# Altium PCB Q24_Steering_Wheel.PcbDoc
Units mm, origin at the board's own origin, x right, y up, seen from the top; angles counter-clockwise.
Board outline 120 x 70 mm, 2 copper layers (Top Layer, Bottom Layer), stack 1.671 mm thick; 64 components, 39 nets, 229 pads, 63 vias.
Unrouted connection lines stored in the file: 2.
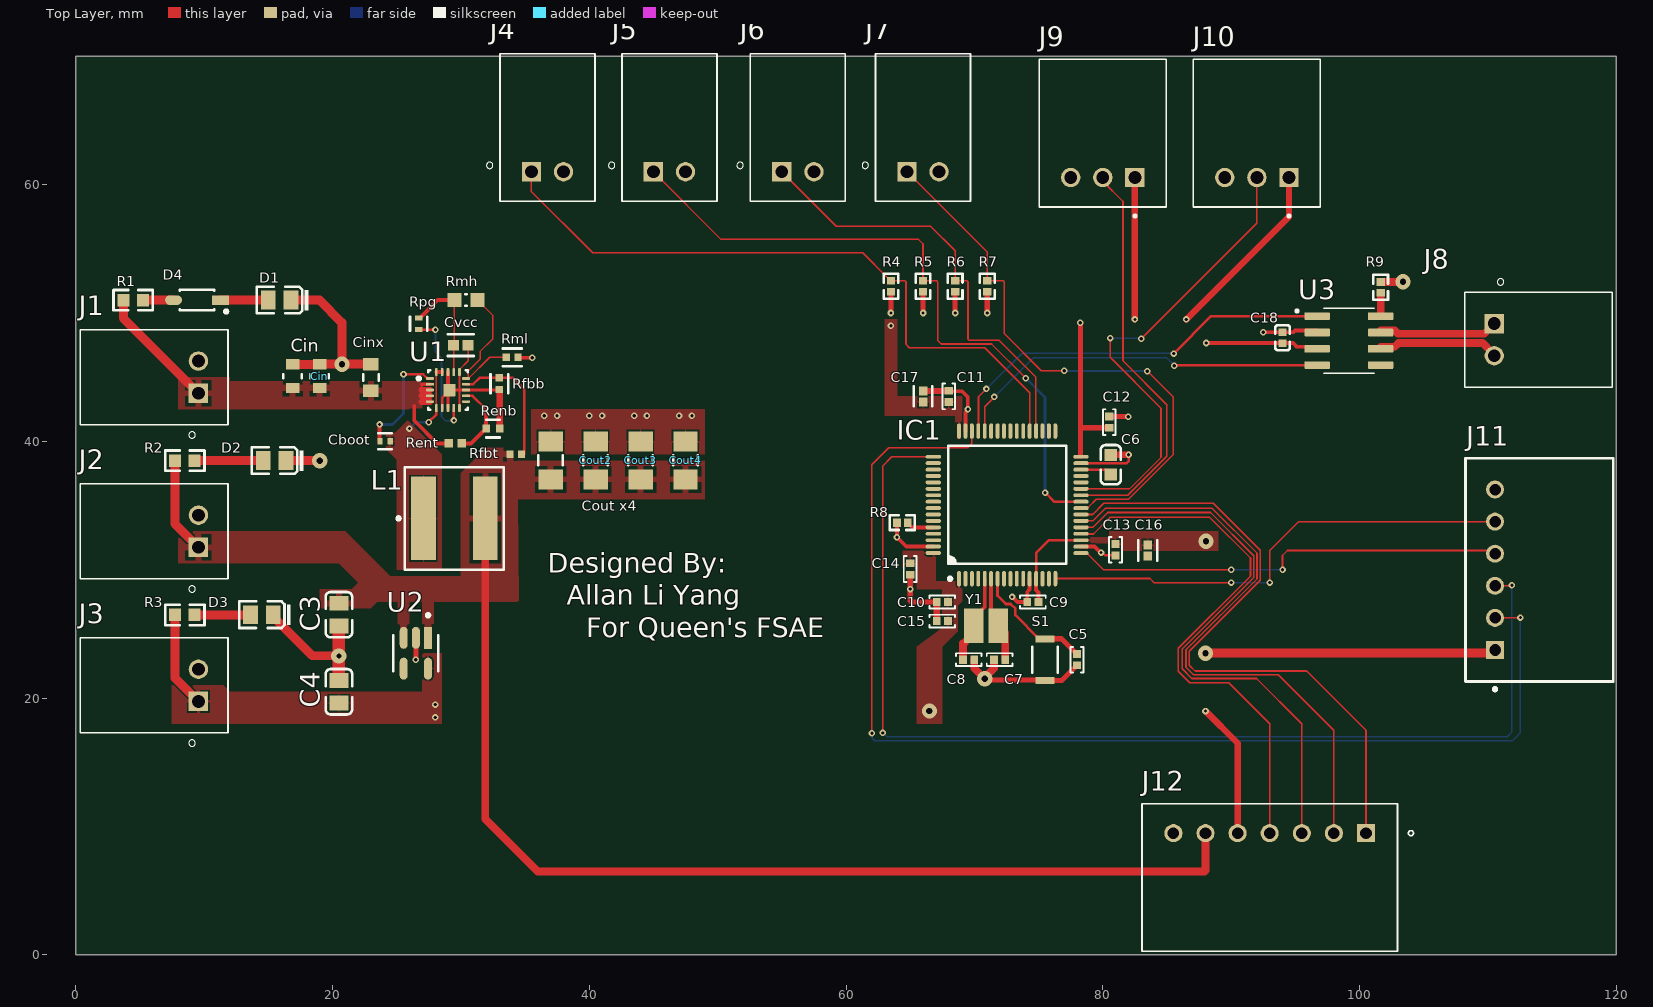
[diagram p0: Top Layer view]
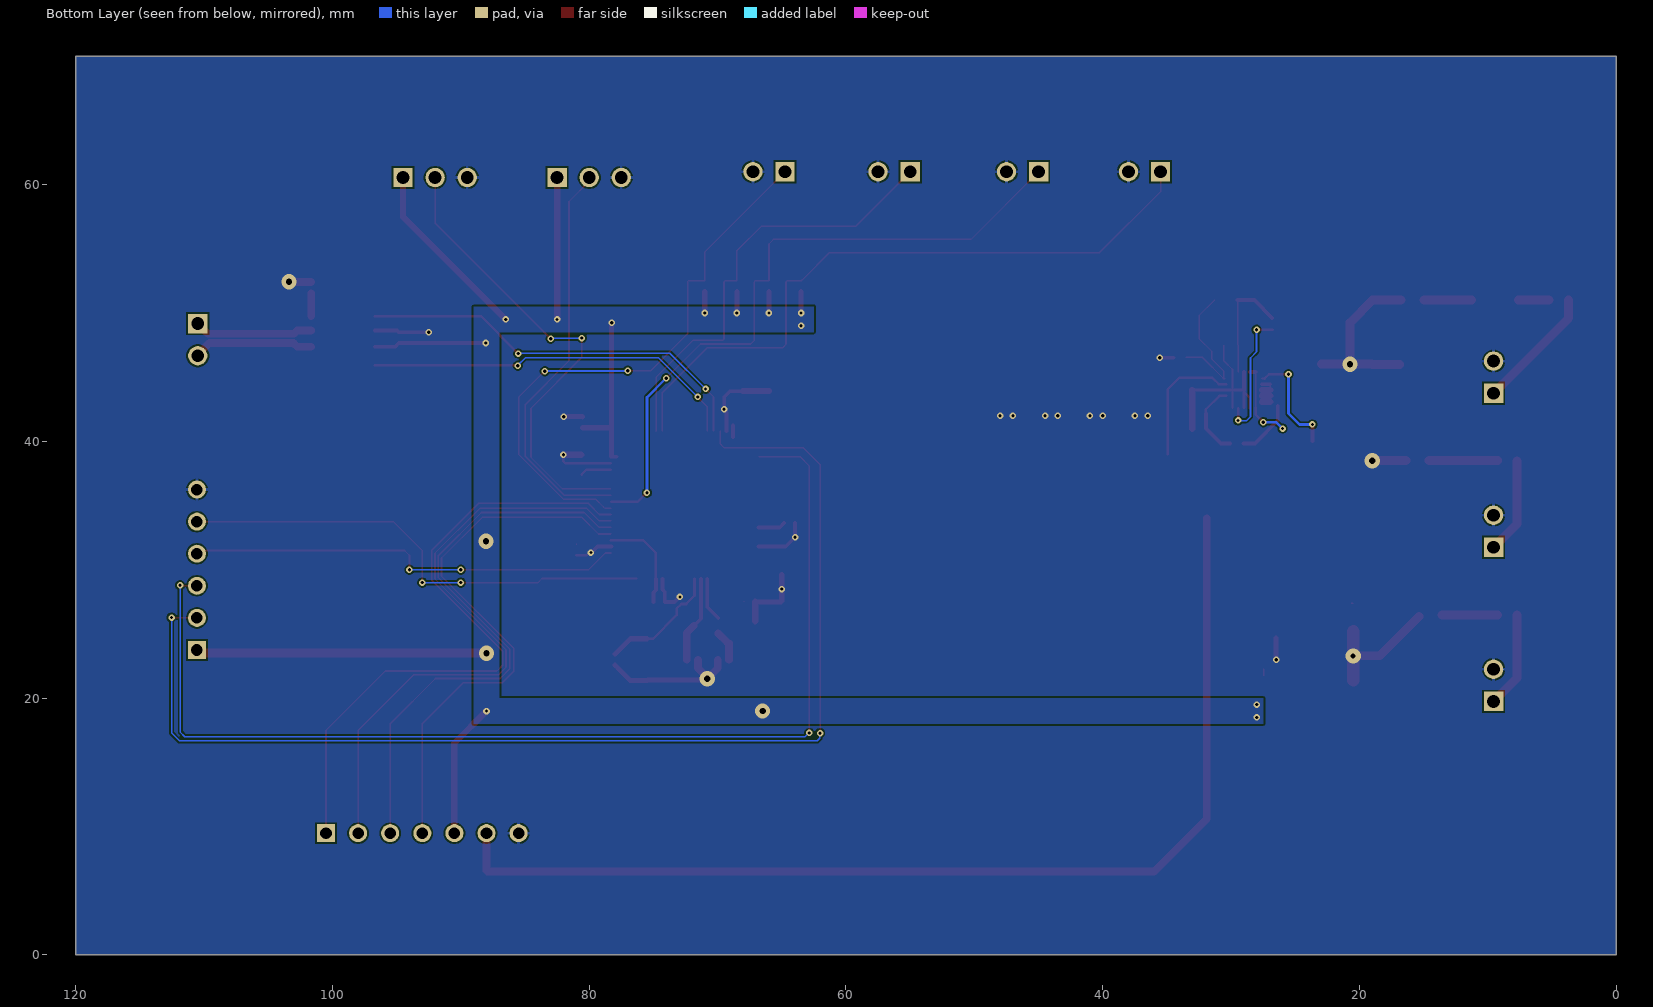
[diagram p1: Bottom Layer view, seen from below]
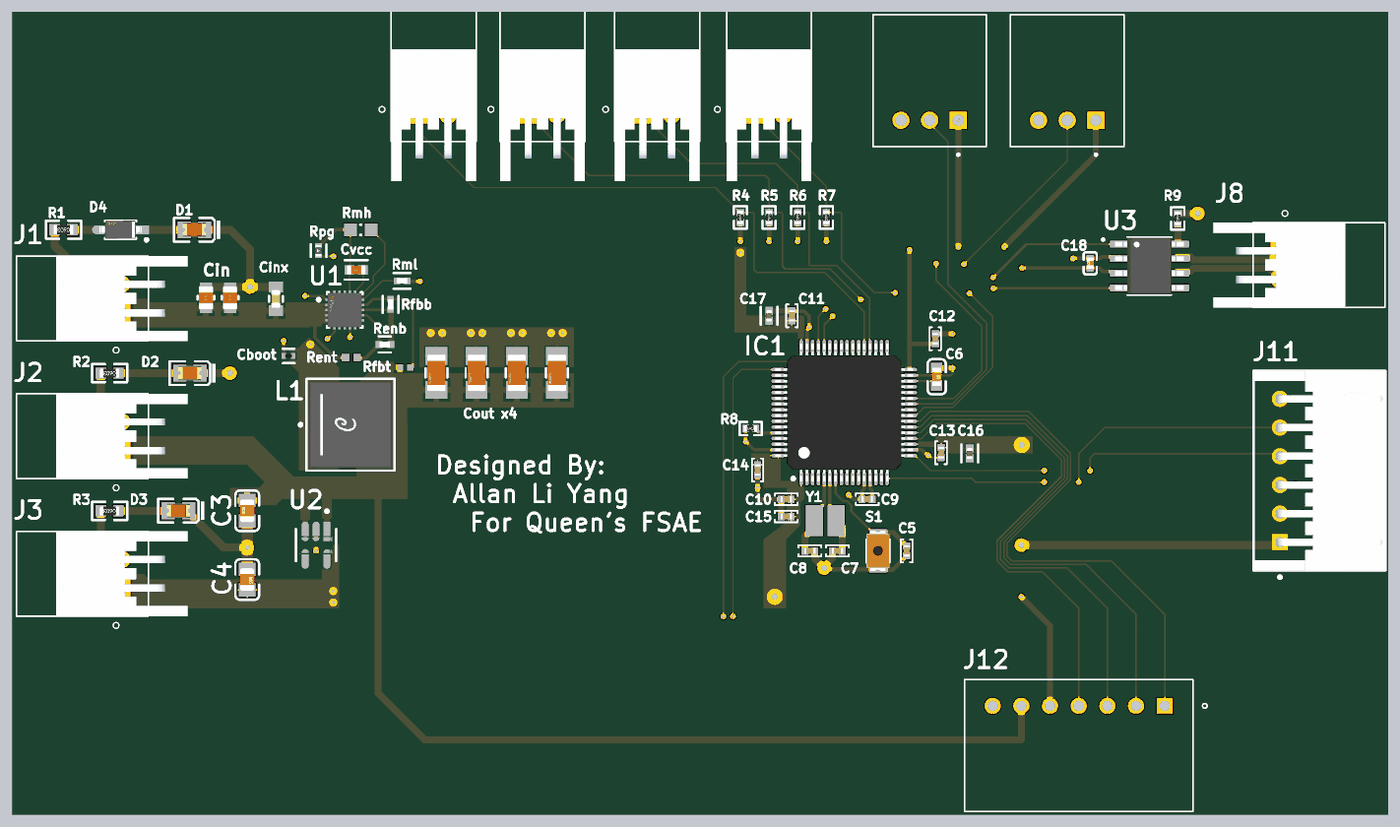
[diagram p2: 3D render of the assembled board from above, using the file's embedded part models]

## Layer stack, top to bottom
Top Solder: solder mask 0.0102, Solder Resist, Dk 3.5
Top Layer: signal copper 0.0356
Dielectric 1: dielectric 1.6, FR-4, Dk 4.8
Bottom Layer: signal copper 0.0356
Bottom Solder: solder mask 0.0102, Solder Resist, Dk 3.5

## Board outline
0,0 0,70 120,70 120,0

## Design rules (kind name [scope] priority, off if disabled: settings)
Clearance [All] p1: gap=0.127 ignorepadtopadclearanceinfootprint=FALSE except(0.25: Arc-Hole Track-Hole SMDPad-Hole THPad-Hole Via-Hole Fill-Hole Poly-Hole Region-Hole Text-Hole; 0.5: THPad-THPad)
DiffPairsRouting [All] p1: maxlimit=0.254 minlimit=0.127 mostfreqgap=0.127 toplayer_minwidth=0.127 toplayer_maxwidth=25.4 toplayer_prefwidth=0.127 bottomlayer_minwidth=0.127 bottomlayer_maxwidth=25.4 bottomlayer_prefwidth=0.127 maxuncoupledlength=12.7
MinimumSolderMaskSliver [All] p1: minsoldermaskwidth=0
PlaneClearance [All] p1: clearance=0.127
PolygonConnect PolygonConnectPowerPad [All vs InNet('VCC12V') or InNet('VCC5V')] p1: thpad.connectstyle=Relief thpad.reliefconductorwidth=0.5 thpad.reliefentries=4 thpad.polygonreliefangle="90 Angle" thpad.airgapwidth=0.254 smdpad.connectstyle=Relief smdpad.reliefconductorwidth=0.5 smdpad.reliefentries=4 smdpad.polygonreliefangle="90 Angle" smdpad.airgapwidth=0.254 via.connectstyle=Direct via.reliefconductorwidth=0.254 via.reliefentries=4 via.polygonreliefangle="90 Angle" via.airgapwidth=0.254
PolygonConnect [All] p2: thpad.connectstyle=Relief thpad.reliefconductorwidth=0.25 thpad.reliefentries=4 thpad.polygonreliefangle="90 Angle" thpad.airgapwidth=0.127 smdpad.connectstyle=Relief smdpad.reliefconductorwidth=0.127 smdpad.reliefentries=4 smdpad.polygonreliefangle="90 Angle" smdpad.airgapwidth=0.127 via.connectstyle=Direct via.reliefconductorwidth=0.127 via.reliefentries=4 via.polygonreliefangle="90 Angle" via.airgapwidth=0.127
RoutingVias [All] p1: holewidth=0.3 width=0.6 viastyle="Through Hole" minholewidth=0.254 minwidth=0.508 maxholewidth=0.6 maxwidth=6.6
SilkToSilkClearance [All] p1: silktosilkclearance=0
SilkToSolderMaskClearance [IsPad] p1: minsilkscreentomaskgap=0.1 clearancetoexposedcopper=TRUE
SolderMaskExpansion [All] p1: expansion=0.102 istentingtop=FALSE
Width [All] p1: maxlimit=25.4 minlimit=0.127 preferedwidth=0.127 minimp=50.000000 maximp=50.000000 favimp=50.000000
25 further rules are at their usual default settings.

## Classes and differential pairs
component class U_Power: C3 C4 Cboot Cin Cinx Cout2 Cout3 Cout4 "Cout x4" Cvcc D1 D2 D3 D4 L1 R1 R2 R3 Renb Rent Rfbb Rfbt Rmh Rml Rpg U2
component class U_MCU: C5 C6 C7 C8 C9 C10 C11 C12 C13 C14 C15 C16 C17 IC1 R8 S1 Y1
component class U_Connectors: J1 J2 J3 J4 J5 J6 J7 J8 J9 J10 J11 J12 R4 R5 R6 R7
component class U_CAN: C18 R9 U3
differential pair CAN1: +CAN1_P -CAN1_N

## Components (designator, comment, footprint, x,y, rotation, side; value= is the part's Value field where it differs from the comment)
C3 "1uF" 0805_C 20.5,26.5 r90 top
C4 "1uF" 0805_C 20.5,20.5 r270 top
C5 "0.1 µF" "CAP 0402_1005" 78,23 r90 top
C6 "2.2uF" 0603_C 80.621,38.181 r270 top
C7 "8 pF" "CAP 0402_1005" 71.964,23 r180 top
C8 "8 pF" "CAP 0402_1005" 69.56,23 r0 top
C9 "0.1 µF" "CAP 0402_1005" 74.56,27.5 r0 top
C10 "0.1 µF" "CAP 0402_1005" 67.5,27.5 r0 top
C11 "0.1 µF" "CAP 0402_1005" 68,43.5 r270 top
C12 "0.1 µF" "CAP 0402_1005" 80.5,41.5 r270 top
C13 "0.1 µF" "CAP 0402_1005" 81,31.56 r90 top
C14 "0.1 µF" "CAP 0402_1005" 65,30.06 r90 top
C15 "0.1 µF" "CAP 0402_1005" 67.5,26 r0 top
C16 "CGB2A1X5R1A105K033BC" FP-CGB2A-IPC_B 83.5,31.5 r270 top
C17 "CGB2A1X5R1A105K033BC" FP-CGB2A-IPC_B 66,43.5 r90 top
C18 "100nF" 0402_C 94,48.075 r90 top
Cboot "GRM155R71C104KA88D" FP-GRM15-MFG 24.1,40 r0 top value=0.10μF
Cin "C2012X5R1V226M125AC" FP-C2012-125-0_2-MFG 19,45.075 r90 top (schematic designator Cin2)
Cin "C2012X5R1V226M125AC" FP-C2012-125-0_2-MFG 16.896,45.075 r90 top (schematic designator Cin1)
Cinx "CGA3E2X7R1H104K080AA" FP-CGA3E-0_3-0_1-IPC_A 23,44.975 r90 top
Cout2 "GRM31CR61A476KE15K" FP-GRM31C-0_2-e0_3_0_8-IPC_A 40.5,38.524 r270 top
Cout3 "GRM31CR61A476KE15K" FP-GRM31C-0_2-e0_3_0_8-IPC_A 44,38.524 r270 top
Cout4 "GRM31CR61A476KE15K" FP-GRM31C-0_2-e0_3_0_8-IPC_A 47.5,38.524 r270 top
"Cout x4" "GRM31CR61A476KE15K" FP-GRM31C-0_2-e0_3_0_8-IPC_A 37,38.524 r270 top (schematic designator Cout1)
Cvcc "EMK107B7105KA-T" FP-0603-L_1_6_0_1-W_0_8_0-IPC_C 30,47.5 r0 top
D1 "0805 Red" 0805_LED_S1 15.89,51 r180 top
D2 "0805 Yellow" 0805_LED_S1 15.5,38.5 r180 top
D3 "0805 Green" 0805_LED_S1 14.5,26.5 r180 top
D4 "1N4148W-TP" FP-SOD-123-IPC_A 9.455,51 r180 top
IC1 "STM32F446RET7" "ST LQFP-64 10X10MM" 72.554,35.054 r90 top
J1 "S2B-XH-A(LF)(SN)" JST_S2B-XH-A(LF)(SN) 9.563,45 r90 top (schematic designator ')
J2 "S2B-XH-A(LF)(SN)" JST_S2B-XH-A(LF)(SN) 9.563,33 r90 top
J3 "S2B-XH-A(LF)(SN)" JST_S2B-XH-A(LF)(SN) 9.563,21 r90 top
J4 "S2B-XH-A(LF)(SN)" JST_S2B-XH-A(LF)(SN) 36.75,61 r0 top
J5 "S2B-XH-A(LF)(SN)" JST_S2B-XH-A(LF)(SN) 46.25,61 r0 top
J6 "S2B-XH-A(LF)(SN)" JST_S2B-XH-A(LF)(SN) 56.25,61 r0 top
J7 "S2B-XH-A(LF)(SN)" JST_S2B-XH-A(LF)(SN) 66,61 r0 top
J8 "S2B-XH-A(LF)(SN)" JST_S2B-XH-A(LF)(SN) 110.488,47.921 r270 top
J9 "S3B-XH-A(LF)(SN)" JST_S3B-XH-A(LF)(SN) 80,64 r0 top
J10 "S3B-XH-A(LF)(SN)" JST_S3B-XH-A(LF)(SN) 92,64 r0 top
J11 "S6B-XH-A (LF)(SN)" FP-S6B-XH-A_LF_SN-MFG 114,30 r270 top
J12 "S7B-XH-A(LF)(SN)" JST_S7B-XH-A(LF)(SN) 93,6.025 r180 top
L1 "XAL7070-182MEC" FP-XAL7070-MFG 29.5,34 r0 top
R1 "1KΩ ±1%" 0603_R 4.487,51 r180 top
R2 "510Ω ±1%" 0603_R 8.5,38.5 r180 top
R3 "220Ω ±1%" 0603_R 8.5,26.486 r180 top
R4 "10KΩ ±1%" 0402_R 63.5,52.075 r270 top
R5 "10KΩ ±1%" 0402_R 66,52.075 r270 top
R6 "10KΩ ±1%" 0402_R 68.5,52.075 r270 top
R7 "10KΩ ±1%" 0402_R 71,52.075 r270 top
R8 "10KΩ ±1%" 0402_R 64.395,33.671 r0 top
R9 "10KΩ ±1%" 0402_R 101.639,51.991 r270 top
Renb "CRCW040251K1FKED" FP-CRCW0402-e3-MFG 32.5,41 r180 top
Rent "CRCW0402221KFKED" RESC1005X40X25ML05T05 29.573,39.85 r180 top
Rfbb "CRCW040215K0FKED" FP-CRCW0402-e3-IPC_B 33,44.5 r90 top
Rfbt "CRCW0402110KFKED" RESC1005X40X25NL05T05 34.268,39 r180 top
Rmh "330K 1% 0603(1608)" RESC0603(1608)_M 30.4,51 r0 top value="330000.00 Ohm"
Rml "CRCW040215K0FKED" FP-CRCW0402-e3-IPC_B 33.997,46.55 r180 top
Rpg "CRCW0402100KFKEDC" FP-CRCW0402-C-e3-MFG 26.719,49.172 r90 top
S1 "KXT341 LHS" "C&K KXT3" 75.5,23 r90 top
U1 "TPS51397ARJER" FP-RJE0020B-MFG 29,44 r0 top
U2 "AP2112K-3.3TRG1" FP-SOT25-IPC_A 26.5,23.5 r270 top
U3 "SN65HVD230DR" SOIC127P599X175-8N 99.169,47.843 r0 top
Y1 "NX3225GD-8MHZ-STD-CRA-3" NDK-NX3225GD-8MHZ-STD-CRA-3_V 70.9,25.639 r0 top

## Footprints (in the part's own frame and the unit in brackets; to place one, negate y for a bottom-side part, rotate by r counter-clockwise, add the part's x,y. Pads: shape width x height; smd on the part's side, far side on the other; paste and mask are expansions set on the pad)
0402_C [mm]
  rect 0.6x0.65 smd mask+0.051: 1(-0.425,0) 2(0.425,0)
  silkscreen extent -0.97,-0.58 0.97,0.58, body extent -0.48,-0.3 0.52,0.3, height 0.2
0402_R [mm]
  rect 0.6x0.65 smd mask+0.051: 1(-0.425,0) 2(0.425,0)
  silkscreen extent -0.97,-0.58 0.97,0.58, body extent -0.57,-0.27 0.58,0.28, height 0.41
0603_C [mm]
  rect 0.93x0.98 smd: 1(-0.77,0) 2(0.77,0)
  silkscreen extent -1.53,-0.79 1.54,0.79, body extent -0.8,-0.4 0.8,0.4, height 0.3
0603_R [mm]
  rect 0.93x0.98 smd: 1(-0.77,0) 2(0.77,0)
  silkscreen extent -1.53,-0.79 1.54,0.79, body extent -0.85,-0.4 0.85,0.4, height 0.56
0805_C [mm]
  rect 1.16x1.47 smd: 1(-0.89,0) 2(0.89,0)
  silkscreen extent -1.77,-1.04 1.77,1.04, body extent -1,-0.62 1,0.63, height 0.77
0805_LED_S1 [mm]
  rect 1.16x1.47 smd: A(0.89,0) K(-0.89,0)
  silkscreen extent -2.24,-1.04 1.77,1.03, body extent -1.01,-0.62 1.01,0.62, height 1.1
"C&K KXT3" [mm]
  rect 0.55x1.5 smd: 1(-1.625,0) 2(1.625,0)
  silkscreen extent -1,-1 1,1, body extent -1.75,-1 1.75,1, height 0.58
"CAP 0402_1005" [mm] "Chip Capacitor, 2-Leads, Body 1.02x0.51mm, IPC Medium Density"
  rect 0.6x0.64 smd: 1(-0.44,0) 2(0.44,0)
  silkscreen extent -1,-0.5 1,0.5, body extent -0.5,-0.26 0.5,0.26, height 0.52
FP-0603-L_1_6_0_1-W_0_8_0-IPC_C [mm]
  rect 0.858x0.812 smd paste+0 mask+0: 1(-0.577,0) 2(0.577,0)
  silkscreen extent -1.01,-0.85 1.01,0.85, body extent -1.11,-0.55 1.11,0.55, height 0.25
FP-C2012-125-0_2-MFG [mm]
  rect 0.8x1.05 smd paste+0 mask+0: 1(-0.925,0) 2(0.925,0)
  silkscreen extent -0.15,-0.72 0.15,0.72, body extent -1.43,-0.82 1.43,0.82, height 0.25
FP-CGA3E-0_3-0_1-IPC_A [mm]
  rect 0.956x1.206 smd paste+0 mask+0: 1(-1.025,0) 2(1.025,0)
  silkscreen extent -0.25,-0.6 0.25,0.6, body extent -2,-1.1 2,1.1, height 0.25
FP-CGB2A-IPC_B [mm]
  rect 0.704x0.658 smd paste+0 mask+0: 1(-0.427,0) 2(0.427,0)
  silkscreen extent -0.78,-0.73 0.78,0.73, body extent -0.93,-0.48 0.93,0.48, height 0.25
FP-CRCW0402-C-e3-MFG [mm]
  rect 0.4x0.6 smd paste+0 mask+0: 1(-0.45,0) 2(0.45,0)
  silkscreen extent -0.55,-0.67 0.55,0.67, body extent -0.75,-0.4 0.75,0.4, height 0.25
FP-CRCW0402-e3-IPC_B [mm]
  rect 0.568x0.572 smd paste+0 mask+0: 1(-0.452,0) 2(0.452,0)
  silkscreen extent -0.74,-0.69 0.74,0.69, body extent -0.89,-0.44 0.89,0.44, height 0.25
FP-CRCW0402-e3-MFG [mm]
  rect 0.6x0.6 smd paste+0 mask+0: 1(-0.525,0) 2(0.525,0)
  silkscreen extent -0.53,-0.7 0.53,0.7, body extent -0.92,-0.4 0.92,0.4, height 0.25
FP-GRM15-MFG [mm]
  rect 0.4x0.5 smd paste+0 mask+0: 1(-0.4,0) 2(0.4,0)
  silkscreen extent -0.53,-0.63 0.53,0.63, body extent -0.7,-0.38 0.7,0.38, height 0.25
FP-GRM31C-0_2-e0_3_0_8-IPC_A [mm]
  rect 1.555x1.906 smd paste+0 mask+0: 1(-1.476,0) 2(1.476,0)
  silkscreen extent -0.4,-0.95 0.4,0.95, body extent -2.75,-1.45 2.75,1.45, height 0.25
FP-RJE0020B-MFG [mm]
  rrect50% 0.6x0.2 smd paste+0 mask+0: 1(-1.4,0.9) 2(-1.4,0.45) 3(-1.4,0) 4(-1.4,-0.45) 5(-1.4,-0.9) 11(1.4,-0.9) 12(1.4,-0.45) 13(1.4,0) 14(1.4,0.45) 15(1.4,0.9)
  rrect50% 0.2x0.6 smd paste+0 mask+0: 6(-0.9,-1.4) 7(-0.45,-1.4) 8(0,-1.4) 9(0.45,-1.4) 10(0.9,-1.4) 16(0.9,1.4) 17(0.45,1.4) 18(0,1.4) 19(-0.45,1.4) 20(-0.9,1.4)
  rrect11% 0.926x0.975 smd paste+0 mask+0: 21(0.123,-0.007)
  silkscreen extent -2.4,-1.55 1.55,1.55, body extent -1.8,-1.8 1.8,1.8, height 0.25
FP-S6B-XH-A_LF_SN-MFG [mm]
  rect 1.4x1.4 hole 0.9 paste-1000 mask+0: 1(6.25,-3.45)
  round 1.4 hole 0.9 paste-1000 mask+0: 2(3.75,-3.45) 3(1.25,-3.45) 4(-1.25,-3.45) 5(-3.75,-3.45) 6(-6.25,-3.45)
  silkscreen extent -8.7,-5.75 9.42,5.75, body extent -8.8,-5.85 8.8,5.85, height 0.25
FP-SOD-123-IPC_A [mm]
  rect 1.308x0.762 smd paste+0 mask+0: 1(-1.825,0)
  rrect100% 1.308x0.762 smd paste+0 mask+0: 2(1.825,0)
  silkscreen extent -2.39,-0.8 1.35,1.01, body extent -2.98,-1.3 2.98,1.3, height 0.25
FP-SOT25-IPC_A [mm]
  rect 1.707x0.616 smd paste+0 mask+0: 1(-1.201,0.95)
  rrect100% 1.707x0.616 smd paste+0 mask+0: 2(-1.201,0) 3(-1.201,-0.95) 4(1.201,-0.95) 5(1.201,0.95)
  silkscreen extent -3.08,-1.75 1.4,1.75, body extent -2.55,-2 2.55,2, height 0.25
FP-XAL7070-MFG [mm]
  rect 1.92x6.5 smd paste+0 mask+0: 1(-2.41,0) 2(2.41,0)
  silkscreen extent -4.47,-4 3.85,4, body extent -3.95,-4.1 3.95,4.1, height 0.25
JST_S2B-XH-A(LF)(SN) [mm]
  rect 1.508x1.508 / inner round 1.508 / far side rect 1.508x1.508 hole 1: 1(-1.25,0)
  round 1.508 hole 1: 2(1.25,0)
  silkscreen extent -4.75,-2.3 3.7,9.2, body extent -3.7,-5.75 3.7,5.75, height 6.1
JST_S3B-XH-A(LF)(SN) [mm]
  rect 1.508x1.508 / inner round 1.508 / far side rect 1.508x1.508 hole 1: 1(2.5,-3.45)
  round 1.508 hole 1: 2(0,-3.45) 3(-2.5,-3.45)
  silkscreen extent -4.95,-6.55 4.95,5.75
JST_S7B-XH-A(LF)(SN) [mm]
  rect 1.408x1.408 hole 0.9: 1(-7.5,-3.46)
  round 1.408 hole 0.9: 2(-5,-3.46) 3(-2.5,-3.46) 4(0,-3.46) 5(2.5,-3.46) 6(5,-3.46) 7(7.5,-3.46)
  silkscreen extent -11.2,-5.75 9.95,5.75
NDK-NX3225GD-8MHZ-STD-CRA-3_V [mm] "SMD, 2-Leads, Body 3.2x2.5mm"
  rect 1.5x2.7 smd: 1(-0.95,0) 2(0.95,0)
  body extent -1.6,-1.25 1.6,1.25, height 1
RESC0603(1608)_M [mm] "Chip Resistor, Body 1.6x0.8mm, IPC Low Density"
  rect 1.1x1.1 smd: 1(-0.9,0) 2(0.9,0)
  silkscreen extent -0.05,-0.45 0.05,0.45, body extent -0.85,-0.47 0.85,0.47, height 0.6
RESC1005X40X25ML05T05 [mm] "Chip Resistor, 2-Leads, Body 1.00x0.50mm, IPC Low Density"
  rect 0.65x0.65 smd: 1(-0.5,0) 2(0.5,0)
  body extent -0.53,-0.27 0.53,0.28, height 0.4
RESC1005X40X25NL05T05 [mm] "Chip Resistor, 2-Leads, Body 1.00x0.50mm, IPC Medium Density"
  rect 0.55x0.55 smd: 1(-0.45,0) 2(0.45,0)
  body extent -0.53,-0.27 0.53,0.28, height 0.4
SOIC127P599X175-8N [mm]
  rrect25% 1.97x0.6 smd: 1(-2.47,1.905) 2(-2.47,0.635) 3(-2.47,-0.635) 4(-2.47,-1.905) 5(2.47,-1.905) 6(2.47,-0.635) 7(2.47,0.635) 8(2.47,1.905)
  silkscreen extent -4.14,-2.52 1.95,2.52, body extent -3,-2.45 3,2.45, height 1.75
"ST LQFP-64 10X10MM" [mm] "LQFP, 64-Leads, Body 10.00x10.00mm, Pitch 0.50mm, IPC Medium Density"
  oval 1.2x0.3 smd: 1(-5.75,3.75) 2(-5.75,3.25) 3(-5.75,2.75) 4(-5.75,2.25) 5(-5.75,1.75) 6(-5.75,1.25) 7(-5.75,0.75) 8(-5.75,0.25) 9(-5.75,-0.25) 10(-5.75,-0.75) 11(-5.75,-1.25) 12(-5.75,-1.75) 13(-5.75,-2.25) 14(-5.75,-2.75) 15(-5.75,-3.25) 16(-5.75,-3.75) 33(5.75,-3.75) 34(5.75,-3.25) 35(5.75,-2.75) 36(5.75,-2.25) 37(5.75,-1.75) 38(5.75,-1.25) 39(5.75,-0.75) 40(5.75,-0.25) 41(5.75,0.25) 42(5.75,0.75) 43(5.75,1.25) 44(5.75,1.75) 45(5.75,2.25) 46(5.75,2.75) 47(5.75,3.25) 48(5.75,3.75)
  oval 0.3x1.2 smd: 17(-3.75,-5.75) 18(-3.25,-5.75) 19(-2.75,-5.75) 20(-2.25,-5.75) 21(-1.75,-5.75) 22(-1.25,-5.75) 23(-0.75,-5.75) 24(-0.25,-5.75) 25(0.25,-5.75) 26(0.75,-5.75) 27(1.25,-5.75) 28(1.75,-5.75) 29(2.25,-5.75) 30(2.75,-5.75) 31(3.25,-5.75) 32(3.75,-5.75) 49(3.75,5.75) 50(3.25,5.75) 51(2.75,5.75) 52(2.25,5.75) 53(1.75,5.75) 54(1.25,5.75) 55(0.75,5.75) 56(0.25,5.75) 57(-0.25,5.75) 58(-0.75,5.75) 59(-1.25,5.75) 60(-1.75,5.75) 61(-2.25,5.75) 62(-2.75,5.75) 63(-3.25,5.75) 64(-3.75,5.75)
  silkscreen extent -5.87,-4.6 4.6,4.6, body extent -6.01,-6.01 6.01,6.01, height 1.6

## Part data
C3 C4: library part "0805 1uF (105) 10% 50V", "Chip capacitors", Manufacturer="Samsung Electro-Mechanics", Package=0805, PartNumber=CL21B105KBFNNNE, SuppliersPartNumber=C28323, Tolerance=10%, Voltage=50V, Capacitance=1uF, ComponentLink1Description="Supplier link", ComponentLink1URL=http://www.szlcsc.com/product/details_29074.html, Supplier=LC
C5 C9 C10 C11 C12 C13 C14 C15: library part C0402C104K4RECAUTO, "CAP CER 0402 0.1UF 16V X7R 10%", Device Package="0402 (1005 Metric)", Manufacturer=KEMET, Operating Temperature="-55°C ~ 125°C", Ratings=AEC-Q200, Supplier Part Number 1=399-17167-1-ND, Temperature Coefficient=X7R, Tolerance=±10%, Voltage - Rated=16V, Applications="Automotive, ESD Protection", Capacitance="0.1 µF", ComponentLink1Description=Datasheet, ComponentLink1URL=https://api.kemet.com/component-edge/download/datasheet/C0402C104K4RECAUTO.pdf, componentlink2description="DigiKey Link", componentlink2url=https://www.digikey.com/en/products/detail/kemet/C0402C104K4RECAUTO/8563695, lastupdated="2023-09-26 7:04:17 PM", Lifecycle Status=Active, Minimum Order=1, Mounting Type="Surface Mount, MLCC", Package / Case="0402 (1005 Metric)", packaging=TapeAndReel, Part Number=C0402C104K4RECAUTO, Part Status=Active, partid=1731, price=0.01, series="ESD SMD Auto X7R", Size / Dimension="0.039\" L x 0.020\" W (1.00mm x 0.50mm)", Supplier 1=DigiKey, Thickness (Max)="0.022\" (0.55mm)"
C6: library part "0603 2.2uF (225) 10% 16V", "Chip capacitors", Manufacturer="Samsung Electro-Mechanics", Package=0603, PartNumber=CL10A225KO8NNNC, SuppliersPartNumber=C23630, Tolerance=10%, Voltage=16V, Capacitance=2.2uF, ComponentLink1Description="Supplier link", ComponentLink1URL=http://www.szlcsc.com/product/details_24366.html, Supplier=LC
C7 C8: library part C1005NP01H080D050BA, "CAP CER 8PF 50V NP0 0402", Device Package="0402 (1005 Metric)", Manufacturer="TDK Corporation", Operating Temperature="-55°C ~ 150°C", Supplier Part Number 1=445-13781-1-ND, Temperature Coefficient="C0G, NP0", Tolerance=±0.5pF, Voltage - Rated=50V, Applications="General Purpose", Capacitance="8 pF", ComponentLink1Description=Datasheet, ComponentLink1URL=https://product.tdk.com/info/en/catalog/datasheets/mlcc_commercial_hightemp_en.pdf?ref_disty=digikey, componentlink2description="DigiKey Link", componentlink2url=https://www.digikey.com/en/products/detail/tdk-corporation/C1005NP01H080D050BA/3951017, Features="High Temperature", lastupdated="2023-09-26 7:04:16 PM", Lifecycle Status=Active, Minimum Order=1, Mounting Type="Surface Mount, MLCC", Package / Case="0402 (1005 Metric)", packaging=TapeAndReel, Part Number=C1005NP01H080D050BA, Part Status=Active, partid=2033, price=0.01, series=C, Size / Dimension="0.039\" L x 0.020\" W (1.00mm x 0.50mm)", Supplier 1=DigiKey, Thickness (Max)="0.022\" (0.55mm)"
C16 C17: library part CMP-08246-005807-1, "Multilayer Ceramic Capacitors 1uF ±10% 10V X5R SMD 0402", Capacitance=1uF, Case Code (Imperial)=0402, Case Code (Metric)=1005, Max Operating Temperature=85°C, Min Operating Temperature=-55°C, Package Quantity=10000, Tolerance=10%, Voltage Rating=10V, Case/Package=0402, Lead Free="Lead Free", Length=0.039inch, Mount="Surface Mount", packaging="Tape and Reel", RoHS Compliant=Yes, series=CGB, Thickness=0.013inch, Width=0.02inch
C18: library part "0402 100nF (104) 10% 16V", "Chip capacitors", Manufacturer="Samsung Electro-Mechanics", Package=0402, PartNumber=CL05B104KO5NNNC, SuppliersPartNumber=C1525, Tolerance=10%, Voltage=16V, Capacitance=100nF, ComponentLink1Description="Supplier link", ComponentLink1URL=http://www.szlcsc.com/product/details_1877.html, Supplier=LC
Cboot: library part CMP-2100-03641-2, "CAP CER 0.1UF 16V X7R 0402", Capacitance=0.10μF, Manufacturer=Murata, Package=GRM15, Temperature="-55°C to +125°C", Temperature Characteristic=X7R, Temperature Range High=+125°C, Temperature Range Low=-55°C, Tolerance=10%, Voltage Rating=16Vdc, Category=Cap, componentlink2description=Datasheet, componentlink2url=https://search.murata.co.jp/Ceramy/image/img/A01X/G101/ENG/GRM155R71H471KA01-01A.pdf, Device Class L1="Passive Components", Device Class L2=Capacitors, Device Class L3="Ceramic Capacitors", Digikey Description="CAP CER 0.1UF 16V X7R 0402", Height=0.55mm, Ipc Land Pattern Name=CAPC10050X219, Lead Free=yes, Manufacturer Part Number=GRM155R71C104KA88D, Material=Ceramic, Mouser Description="0402 0.1 uF 16V ±10 % Tolerance X7R SMT Multilayer Ceramic Capacitor", Octopart=https://octopart.com/grm155r71c104ka88d-murata-196880, RoHS=TRUE, Standoff Height=0mm
Cin Cin: library part CMP-2000-06038-3, "Multilayer Ceramic Capacitors 22μF ±20% 35V X5R SMD 0805", Capacitance=22uF, Case Code (Imperial)=0805, Case Code (Metric)=2012, Dielectric=X5R, Dielectric Material=Ceramic, Max Operating Temperature=85°C, Min Operating Temperature=-55°C, Package Quantity=2000, Tolerance=20%, Voltage Rating=35V, Case/Package=0805, Height=1.25mm, Lead Free="Lead Free", Length=0.079inch, Mount="Surface Mount", packaging="Tape and Reel", REACH SVHC="No SVHC", RoHS Compliant=Yes, series=C, Termination=SMD/SMT, Thickness=0.057inch, Voltage Rating (DC)=35V, Weight=0.000194oz, Width=0.049inch
Cinx: library part CMP-2000-07546-2, "Cap Ceramic 100nF 50V X7R 10% Pad SMD 0603 +125°C Automotive T/R", Capacitance=100nF, Case Code (Imperial)=0603, Case Code (Metric)=1608, Dielectric=X7R, Max Operating Temperature=125°C, Min Operating Temperature=-55°C, Package Quantity=1, Ratings=AEC-Q200, Tolerance=10%, Voltage=50V, Case/Package=0603, Composition=Ceramic, Depth=0.8mm, Height=0.8mm, Lead Free="Lead Free", Length=1.6mm, Mount="Surface Mount", packaging="Tape and Reel", Radiation Hardening=No, REACH SVHC="No SVHC", Termination=SMD/SMT, Thickness=0.035inch, Voltage Rating=50V, Voltage Rating (DC)=50V, Weight=7.1E-05oz, Width=0.8mm
Cout2 Cout3 Cout4 "Cout x4": library part CMP-06035-007919-1, "Chip Multilayer Ceramic Capacitors for General Purpose, 1206, 47uF, X5R, 15%, 10%, 10V", Capacitance=47uF, Case Code (Imperial)=1206, Case Code (Metric)=3216, Dielectric=X5R, Max Operating Temperature=85°C, Min Operating Temperature=-55°C, Package Quantity=6000, Resistor Type=Ceramic, Tolerance=10%, Voltage Rating=10V, Case/Package=1206, Depth=1.6mm, Height=1.6mm, Length=3.2mm, Mount="Surface Mount", packaging="Tape and Reel", Termination=SMD/SMT, Thickness=0.071inch, Voltage Rating (DC)=10V, Weight=0.001411oz, Width=0.063inch
Cvcc: library part CMP-14477-000018-3, "None", Capacitance=1uF, Case Code (Imperial)=0603, Case Code (Metric)=1608, Dielectric=X7R, Max Operating Temperature=125°C, Min Operating Temperature=-55°C, Package Quantity=1, Resistor Type=Ceramic, Tolerance=10%, Voltage Rating=16V, Case/Package=0603, Construction=Flat, Contact Plating=Nickel, Depth=0.8mm, Halogen Free="Halogen Free", Height=0.8mm, Lead Free="Lead Free", Length=1.6mm, Mount="Surface Mount", Number of Pins=2, packaging="Tape and Reel", Radiation Hardening=No, REACH SVHC="No SVHC", RoHS Compliant=Yes, series=M, Termination=SMD/SMT, Thickness=0.035inch, Voltage Rating (DC)=16V, Width=0.031inch
D1: library part "0805 LED Red", "LED", Color=Red, Manufacturer="Foshan NationStar Optoelectronics", Package=0805, PartNumber=FC-2012HRK-620D, SuppliersPartNumber=C84256, ComponentLink1Description=供应商链接, ComponentLink1URL=http://www.szlcsc.com/product/details_2668.html, Supplier=LC
D2: library part "0805 LED Yellow", "LED", Color=Yellow, Package=0805, PartNumber=17-21SUYC/TR8, SuppliersPartNumber=C2296, ComponentLink1Description=供应商链接, ComponentLink1URL=http://www.szlcsc.com/product/details_2669.html, Supplier=LC
D3: library part "0805 LED Green", "LED", Color=Green, Package=0805, SuppliersPartNumber=C2297, ComponentLink1Description=供应商链接, ComponentLink1URL=http://www.szlcsc.com/product/details_2670.html, Supplier=LC
D4: library part CMP-2000-04993-2, "DIODE GEN PURP 100V 150MA SOD123", Average Rectified Current=150mA, Capacitance=4pF, Forward Voltage=1V, Max Forward Surge Current (Ifsm)=1A, Max Operating Temperature=150°C, Max Repetitive Reverse Voltage (Vrrm)=100V, Max Reverse Leakage Current=5uA, Max Surge Current=2A, Min Operating Temperature=-65°C, Package Quantity=3000, Power Dissipation=400mW, Current Rating=150mA, Element Configuration=Single, Forward Current=150mA, Height=1.2mm, Lead Free="Lead Free", Length=2.85mm, Max Reverse Voltage (DC)=100V, Mount="Surface Mount", Number of Pins=2, Output Current=150mA, packaging="Tape and Reel", Peak Non-Repetitive Surge Current=2A, Polarity=Standard, Radiation Hardening=No, Recovery Time=4ns, Reverse Recovery Time=4ns, Voltage Rating (DC)=100V, Width=1.8mm
IC1: "IC MCU 32BIT 512KB FLASH 64LQFP", Manufacturer=STMicroelectronics, Operating Temperature="-40°C ~ 105°C (TA)", Supplier Device Package="64-LQFP (10x10)", Supplier Part Number 1=497-16775-ND, Voltage - Supply (Vcc/Vdd)="1.7V ~ 3.6V", ComponentLink1Description=Datasheet, ComponentLink1URL=https://www.st.com/content/ccc/resource/technical/document/datasheet/65/cb/75/50/53/d6/48/24/DM00141306.pdf/files/DM00141306.pdf/jcr:content/translations/en.DM00141306.pdf, componentlink2description="DigiKey Link", componentlink2url=https://www.digikey.com/en/products/detail/stmicroelectronics/STM32F446RET7/6207480, Connectivity="CANbus, EBI/EMI, I²C, IrDA, LINbus, SAI, SD, SPDIF-Rx, SPI, UART/USART, USB, USB OTG", Core Processor="ARM® Cortex®-M4", Core Size="32-Bit Single-Core", Data Converters="A/D 16x12b; D/A 2x12b", lastupdated="2023-07-12 8:21:53 PM", Lifecycle Status=Active, Minimum Order=1, Mounting Type="Surface Mount", Number of I/O=50, Oscillator Type=Internal, packaging=Tray, Part Number=STM32F446RET7, Part Status=Active, partid=220, Peripherals="Brown-out Detect/Reset, DMA, I²S, LVD, POR, PWM, WDT", price=7.43, Program Memory Size="512KB (512K x 8)", Program Memory Type=FLASH, RAM Size="128K x 8", series=STM32F4, Speed=180MHz, Supplier 1=DigiKey
J1 J2 J3 J4 J5 J6 J7 J8: "Connector Header Through Hole, Right Angle 2 position 0.098 (2.50mm)", Package=None, Check_prices=https://www.snapeda.com/parts/S2B-XH-A(LF)(SN)/JST+Sales+America+Inc./view-part/?ref=eda, Digi-Key_Part_Number=455-2257-ND, MF="JST Sales", MP=S2B-XH-A(LF)(SN), Purchase-URL=https://pricing.snapeda.com/search/part/S2B-XH-A(LF)(SN)/?ref=eda, SnapEDA_Link=https://www.snapeda.com/parts/S2B-XH-A(LF)(SN)/JST+Sales+America+Inc./view-part/?ref=snap
J9 J10: "CONN, R/A HEADER, 3POS, 1ROW, 2.5MM; Connector Systems:Wire-to-Board; Pitch Spacing:2.5mm; No. of Rows:1Rows; No. of Contacts:3Contacts; Contact Termination Type:Through Hole Right Angle; Product Range:XH Series RoHS Compliant: Yes", Package=None, Availability="In Stock", Check_prices=https://www.snapeda.com/parts/S3B-XH-A%20(LF)(SN)/JST/view-part/?ref=eda, MF=JST, MP="S3B-XH-A (LF)(SN)", price=None, Purchase-URL="https://pricing.snapeda.com/search/part/S3B-XH-A (LF)(SN)/?ref=eda", SnapEDA_Link=https://www.snapeda.com/parts/S3B-XH-A%20(LF)(SN)/JST/view-part/?ref=snap
J11: library part CMP-17439-000165-2, "CONN HEADER R/A 6POS 2.5MM", Color=Natural, Contact Resistance=20mR, Current Rating=3A, Flammability Rating="UL94 V-0", Housing Color=White, Insulation Resistance=1GR, Max Operating Temperature=85°C, Max Voltage Rating (AC)=250V, Min Operating Temperature=-25°C, Package Quantity=500, Connector Type=Header, Contact Finish - Mating=TIN, Contact material=Brass, Contact Plating=Tin, Contact Shape=Square, Contact Type="Male Pin", Depth=11.5mm, Fastening Type=Detent, Gender=Male, Housing Material=Polyamide, Insulation Color=Natural, Insulation Material=Nylon, Lead Free="Lead Free", Lead Pitch=2.5mm, Length=17.4mm, Max Current Rating=3A, Mount="Through Hole", Number of Contacts=6, Number of Positions=6, Number of Rows=1, Orientation="Right Angle", packaging=Bulk, Pitch=2.5mm, REACH SVHC="No SVHC", series=XH, Termination=Solder, Voltage Rating=250V, Voltage Rating (AC)=250V, Wire/Cable Gauge=22AWG
J12: "Connector Header Through Hole, Right Angle 7 position 0.098 _2.50mm_", Package=None, Availability=Unavailable, MF="JST Sales", MP=S7B-XH-A_LF__SN_, price=None, SnapEDA_Link=https://www.snapeda.com/parts/S7B-XH-A%28LF%29%28SN%29/JST%20Sales%20America%20Inc./view-part/2768211/?ref=snap
L1: library part CMP-11268-000116-1, "Surface Mount Power Inductor, 1.8 H, 21 A, 25 A, Shielded, 4460 ohm", Case/Package=SMD/SMT, DC Resistance (DCR)=4.46mR, Inductance=1.8uH, Inductance Tolerance=20%, Max DC Current=21A, Max Operating Temperature=125°C, Min Operating Temperature=-40°C, Package Quantity=150, Saturation Current=25A, Self Resonant Frequency=43MHz, Test Frequency=100kHz, Core Material=Composite, Height=7mm, Lead Free="Contains Lead", Length=8mm, Mount="Surface Mount", packaging="Tape and Reel", REACH SVHC="No SVHC", RMS Current (Irms)=21A, RoHS Compliant=Yes, series=XAL7070, Shielding=Shielded, Termination=SMD/SMT, Tolerance=20%, Width=7.7mm
R1: library part "0603 1K (1001) 1%", "Chip resistor", Manufacturer="Uniroyal Elec", Package=0603, PartNumber=0603WAF1001T5E, Power=1/10W, Resistance=1KΩ, SuppliersPartNumber=C21190, Tolerance=1%, ComponentLink1Description="Supplier link", ComponentLink1URL=http://www.szlcsc.com/product/details_21904.html, Supplier=LC
R2: library part "0603 510R (5100) 1%", "Chip resistor", Manufacturer="Uniroyal Elec", Package=0603, PartNumber=0603WAF5100T5E, Power=1/10W, Resistance=510Ω, SuppliersPartNumber=C23193, Tolerance=1%, ComponentLink1Description="Supplier link", ComponentLink1URL=http://www.szlcsc.com/product/details_23920.html, Supplier=LC
R3: library part "0603 220R (2200) 1%", "Chip resistor", Manufacturer="Uniroyal Elec", Package=0603, PartNumber=0603WAF2200T5E, Power=1/10W, Resistance=220Ω, SuppliersPartNumber=C22962, Tolerance=1%, ComponentLink1Description="Supplier link", ComponentLink1URL=http://www.szlcsc.com/product/details_23689.html, Supplier=LC
R4 R5 R6 R7 R8 R9: library part "0402 10K (1002) 1%", "Chip resistor", Manufacturer="Uniroyal Elec", Package=0402, PartNumber=0402WGF1002TCE, Power=1/16W, Resistance=10KΩ, SuppliersPartNumber=C25744, Tolerance=1%, ComponentLink1Description="Supplier link", ComponentLink1URL=http://www.szlcsc.com/product/details_26487.html, Supplier=LC
Renb: library part CMP-2002-00080-2, "RES Thick Film, 51.1kΩ, 1%, 0.063W, 100ppm/°C, 0402", Case Code (Imperial)=0402, Case Code (Metric)=1005, Max Operating Temperature=155°C, Max Power Dissipation=63mW, Min Operating Temperature=-55°C, Package Quantity=10, Resistance=51.1kR, Temperature Coefficient=100ppm/°C, Tolerance=1%, Voltage Rating=50V, Case/Package=0402, Composition="Thick Film", Contact Plating=Tin, Depth=0.5mm, Features="Automotive AEC-Q200", Height=0.35mm, Lead Free="Lead Free", Length=1mm, Military Standard=Not, Mount="Surface Mount", Number of Pins=2, Number of Terminations=2, packaging="Tape and Reel", Power Rating=63mW, Radiation Hardening=No, Termination=SMD/SMT, Voltage Rating (DC)=50V, Weight=2.3E-05oz, Width=0.5mm
Rent: library part CMP-2002-08374-1, Manufacturer="Vishay Dale", Part Number=CRCW0402221KFKED
Rfbb Rml: library part CMP-2002-08219-2, "RES Thick Film, 15kΩ, 1%, 0.063W, 100ppm/°C, 0402", Case Code (Imperial)=0402, Case Code (Metric)=1005, Max Operating Temperature=155°C, Max Power Dissipation=63mW, Min Operating Temperature=-55°C, Package Quantity=10, Resistance=15kR, Temperature Coefficient=100ppm/°C, Tolerance=1%, Voltage Rating=50V, Case/Package=0402, Composition="Thick Film", Contact Plating=Tin, Depth=0.5mm, Features="Automotive AEC-Q200", Height=0.35mm, Lead Free="Lead Free", Length=1mm, Military Standard=Not, Mount="Surface Mount", Number of Terminations=2, packaging="Tape and Reel", Power Rating=63mW, Radiation Hardening=No, Termination=SMD/SMT, Voltage Rating (DC)=50V, Weight=2.3E-05oz, Width=0.02inch, Working Voltage=50V
Rfbt: library part CMP-2002-08148-1, Manufacturer="Vishay Dale", Part Number=CRCW0402110KFKED
Rmh: library part CMP-1012-00793-1, "330K 0.1W 1% 0603 (1608 Metric)  SMD", Case-EIA=0603, Case-Metric=1608, Power="0.1 W", Tolerance="1 %", Technology=SMT
Rpg: library part CMP-02407-010951-1, "RES 100K OHM 1% 1/16W 0402", Case/Package=SMD/SMT, Max Operating Temperature=155°C, Min Operating Temperature=-55°C, Power Rating=62.5mW, Resistance=100kR, Resistor Type="Thick Film", Temperature Coefficient=100ppm/°C, Tolerance=1%, Contact Plating=Tin, Lead Free="Lead Free", Length=1mm, Mount="Surface Mount", RoHS Compliant=Yes, Termination=Wraparound
S1: "SWITCH TACTILE SPST-NO 0.02A 15V", Contact Rating @ Voltage="0.02A @ 15VDC", Manufacturer=C&K, Operating Force=330gf, Operating Temperature="-40°C ~ 85°C", Supplier Part Number 1=CKN10781CT-ND, Actuator Height off PCB, Vertical=0.60mm, Actuator Orientation="Top Actuated", Actuator Type=Standard, Circuit=SPST-NO, ComponentLink1Description=Datasheet, ComponentLink1URL=https://dznh3ojzb2azq.cloudfront.net/products/Tactile/KXT3/documents/datasheet.pdf, componentlink2description="DigiKey Link", componentlink2url=https://www.digikey.com/en/products/detail/c-k/KXT341-LHS/6607322, Illumination=Non-Illuminated, lastupdated="2023-09-26 8:43:27 PM", Lifecycle Status=Active, Minimum Order=1, Mounting Type="Surface Mount", Outline="3.00mm x 2.00mm", packaging=TapeAndReel, Part Number="KXT341 LHS", Part Status=Active, price=0.13, series=KXT3, Supplier 1=DigiKey, Switch Function=Off-Mom, Termination Style="SMD (SMT) Tab"
U1: library part CMP-04918-000702-1, "10-A SYNCHRONOUS STEP-DOWN REGUL"
U2: library part CMP-12756-000035-1, "IC REG LINEAR 3.3V 600MA SOT25", Case/Package=SOT-23-5, Dropout Voltage=250mV, Max Input Voltage=6V, Max Operating Temperature=85°C, Max Output Current=600mA, Min Input Voltage=2.5V, Min Operating Temperature=-40°C, Output Voltage=3.3V, Package Quantity=1, Quiescent Current=55uA, Accuracy=1.5%, Height=1.3mm, Lead Free="Lead Free", Length=3.1mm, Mount="Surface Mount", Number of Outputs=1, Number of Pins=5, Number of Regulators=1, Output Current=600mA, Output Type=Fixed, packaging="Tape and Reel", Polarity=Positive, Width=1.7mm
U3: "3.3 V CAN Transceiver with Standby Mode", Package="SOIC-8 Texas Instruments", Availability="In Stock", Check_prices=https://www.snapeda.com/parts/SN65HVD230DR/Texas+Instruments/view-part/?ref=eda, MF="Texas Instruments", MP=SN65HVD230DR, price=None, Purchase-URL=https://pricing.snapeda.com/search/part/SN65HVD230DR/?ref=eda, SnapEDA_Link=https://www.snapeda.com/parts/SN65HVD230DR/Texas+Instruments/view-part/?ref=snap
Y1: library part CMP-2000-07595-1, "Crystal Unit, 8 MHz, 8 pF, -40 to 150 degC, 2-Pin SMD, RoHS, Tape and Reel", Case/Package=SMD/SMT, ESR (Equivalent Series Resistance)=500Ohm, Frequency=8MHz, Frequency Stability=150ppm, Frequency Tolerance=50ppm, Load Capacitance=8pF, Manufacturer=NDK, Max Operating Temperature=150degC, Min Operating Temperature=-40degC, Package Description="2-Pin Surface Mount Device, Body 3.2 x 2.5 mm", Package Quantity=3000, Datasheet URL=http://www.ndk.com/images/products/catalog/c_NX3225GD-STD-CRA-3_e.pdf, Datasheet Version=11/2016, Height=0.039inch, Length=0.126inch, Manufacturer URL=http://www.ndk.com/en/, Mount=SurfaceMount, Mounting Technology=SurfaceMount, Number of Pins=2, Package Reference=NX3225GD-8MHZ-STD-CRA-3, packaging=TapeandReel, RoHSCompliant=True, Width=0.098inch

## Via types
v1: diameter 0.508, hole 0.254, Top Layer to Bottom Layer, 55 vias
v2: diameter 1.2, hole 0.5, Top Layer to Bottom Layer, 7 vias
v3: diameter 1.2, hole 0.4, Top Layer to Bottom Layer, 1 vias

## Nets (pads, with @x,y where several pads share a name; then routed paths per layer and width w, separated by ;. In a path a pad name is that pad's centre, name@x,y a point inside that pad or via, vN(x,y) a via of type N, cw(c..) or ccw(c..) an arc to the next point about the centre after c; other vN are vias at no path point)
BUTTON1: IC1.37 J4.1 R4.1 | length 52.7
  Top Layer w0.127: J4.1 35.5,59.453 40.273,54.68 61.3,54.68 63.238,52.742 63.238,52.736 63.475,52.5 R4.1 64.599,52.5 64.674,52.426 64.674,47.555 64.935,47.293 70.81,47.293 74.31,43.793 IC1.37@74.31,40.81
BUTTON2: IC1.25 J5.1 R5.1 | length 52.6
  Top Layer w0.127: J5.1 50.271,55.729 65.644,55.729 66,55.373 R5.1 67.06,52.5 67.15,52.41 67.15,47.85 67.41,47.59 71.338,47.59 v1@73.959,44.97
  Top Layer w0.2: v1(75.5,36) 75.536,36 76.242,35.293 IC1.25@78.293,35.293
  Bottom Layer w0.127: v1(74.003,44.918) v1@74.043,44.918
  Bottom Layer w0.2: v1@74.043,44.918 74.043,44.878 75.5,43.421 v1(75.5,36)
BUTTON3: IC1.36 J6.1 R6.1 | length 34.6
  Top Layer w0.127: J6.1 59.243,56.757 66.586,56.757 68.5,54.843 R6.1 69.426,52.5 69.5,52.426 69.5,47.965 69.574,47.891 71.903,47.891 74.783,45.011 74.783,40.825 IC1.36
BUTTON4: IC1.24 J7.1 R7.1 | length 45.1
  Top Layer w0.127: J7.1 71,54.75 R7.1 72.263,52.5 72.337,52.426 72.337,48.381 75.218,45.5 v1(77,45.5) ; IC1.24 78.801,34.804 78.888,34.891 78.891,34.891 79.5,35.5 82,35.5 85.5,39 85.5,43.449 83.481,45.468 v1(83.455,45.468)
  Bottom Layer w0.127: v1(77,45.5) 77.016,45.484 83.439,45.484 v1(83.455,45.468)
CAN1_N: J8.2 U3.6 | length 10.3
  Top Layer w0.127: J8.2@110.124,46.671 J8.2 ; J8.2@110.395,47 J8.2@111,47
  Top Layer w0.6: U3.6@101.639,47.365 102.742,47.365 103.037,47.66 109.579,47.66 110.232,47.008 110.232,46.779 J8.2@110.124,46.671
CAN1_P: J8.1 U3.7 | length 9.3
  Top Layer w0.6: U3.7@101.639,48.635 102.742,48.635 102.99,48.387 109.704,48.387 J8.1
GND: "Cout x4.1" C3.1 C4.1 C5.1 C6.1 C7.2 C8.2 C9.1 C10.1 C11.1 C12.1 C13.1 C14.1 C15.1 C16.2 C17.2 C18.2 Cin.2 Cinx.2 Cout2.1 Cout3.1 Cout4.1 Cvcc.2 D1.K D2.K D3.K IC1.12 IC1.18 IC1.31 IC1.47 IC1.63 J1.2 J2.2 J3.2 J4.2 J5.2 J6.2 J7.2 J9.3 J10.3 J11.6 J12.7 R8.1 R9.1 Renb.1 Rfbb.1 Rml.1 S1.1 U1.7 U1.8 U1.10 U1.13 U1.16 U1.18 U1.21 U2.2 U3.2 | length 93.3
  Top Layer w0.127: D3.K@15.39,26.345 D3.K ; Cin.2@19,46 Cin.2@19.016,46.016 ; v3@20.478,23.304 v3(20.498,23.284) ; C4.1@20.498,21.392 C4.1 ; C3.1@20.498,25.608 C3.1 ; Cinx.2@22.984,46.016 Cinx.2 ; U1.21@29,43.846 29,43.993 U1.21 ; U1.10 29.9,44 U1.16 29.9,45.6 30.577,46.277 Cvcc.2 ; Renb.1 Renb.1@33.048,41 ; Rml.1 Rml.1@34.49,46.509 ; R8.1@63.967,33.667 R8.1 ; C11.1@67.987,43.927 C11.1 ; v2@70.811,21.608 v2(70.811,21.51) v2@70.918,21.403 ; C9.1@74.109,27.489 C9.1 ; S1.1@75.472,21.403 S1.1 ; C5.1@77.743,22.317 C5.1@77.743,22.324 ; C5.1@77.98,22.56 C5.1 ; v1(79.867,31.341) v1@79.97,31.341 ; C12.1 C12.1@80.527,41.913 ; C6.1@80.596,38.951 C6.1 C6.1@80.625,38.955 ; R9.1 R9.1@101.641,52.418
  Top Layer w0.2: U1.7 28.55,43.396 29,43.846 U1.8 ; U1.21@29.123,44 29.9,44 U1.13 Rfbb.1@33,44 ; IC1.31@78.311,38.297 81.856,38.297 82.005,38.447 v1(82.005,38.955) ; v1@79.97,31.341 80.191,31.12 C13.1
  Top Layer w0.3: U1.21@29,43.993 U1.18 ; Rml.1@34.49,46.509 v1(35.568,46.509) ; R8.1@63.967,33.667 v1(63.967,32.533) 64.696,31.804 66.354,31.804 IC1.63 ; C11.1 68.039,43.901 69.029,43.901 69.481,43.45 v1@69.481,42.519 ; IC1.47@69.304,40.807 69.304,42.248 v1@69.5,42.444 ; v1(72.936,27.889) 72.97,27.889 73.37,27.489 C9.1@74.109,27.489 ; C9.1 74.12,28.277 74.301,28.458 74.301,28.851 74.304,28.854 IC1.12@74.304,29.301 ; IC1.18@78.258,31.804 IC1.18 79.354,31.804 79.818,31.341 v1(79.867,31.341) ; v1(92.5,48.5) C18.2 94.842,48.5 94.977,48.635 U3.2@96.699,48.635
  Top Layer w0.4: v1(26.5,23) U2.2 ; C14.1 v1(65,28.5) 65,27.574 65.074,27.5 C10.1 ; v2@70.918,21.403 S1.1@75.472,21.403 ; S1.1 76.802,21.375 C5.1@77.743,22.317 ; C5.1@77.743,22.324 C5.1@77.98,22.56 ; C12.1@80.527,41.913 80.545,41.931 81.981,41.931 v1(81.991,41.922)
  Top Layer w0.5: Renb.1@33.048,41 Rfbb.1@33.048,44 ; C17.2 C11.1@67.987,43.927 ; C15.1 C10.1 ; C6.1@80.625,38.955 v1(82.005,38.955)
  Top Layer w0.6: C8.2 70,22.321 v2(70.811,21.51) ; v2@70.811,21.608 71.524,22.322 C7.2 ; R9.1@101.641,52.418 v2(103.383,52.418)
  Top Layer w0.7: D3.K@15.39,26.345 18.431,23.304 v3@20.478,23.304 ; D2.K v2(19,38.5) ; D1.K 19,51 20.746,49.254 v2(20.746,46.016) ; Cin.2@16.896,46 Cin.2@19,46 ; Cin.2@19.016,46.016 v2(20.746,46.016) ; Cinx.2@22.984,46.016 v2(20.746,46.016)
  Top Layer w1: C4.1@20.498,21.392 v3(20.498,23.284) C3.1@20.498,25.218
  other v1: 36.5,42 37.5,42 40,42 41,42 43.5,42 44.5,42 47,42 48,42 69.5,42.5
NetC5_2: C5.2 IC1.7 S1.2 | length 9.7
  Top Layer w0.127: C5.2@77.98,23.44 C5.2
  Top Layer w0.2: IC1.7@71.797,29.297 71.797,27.993 72.455,27.335 72.823,27.335 73.186,26.971 73.186,26.464 75.025,24.625 S1.2
  Top Layer w0.4: S1.2 76.795,24.625 C5.2@77.98,23.44
NetC6_2: C6.2 IC1.30 | length 2.5
  Top Layer w0.2: IC1.30@78.306,37.806 80.201,37.806 C6.2@80.596,37.411
NetCboot_1: Cboot.1 U1.1 | length 8.8
  Top Layer w0.127: Cboot.1@23.675,40.025 Cboot.1 ; v1(25.537,45.227) v1@25.538,45.225 ; U1.1@27.4,44.9 U1.1
  Top Layer w0.2: v1@25.538,45.225 27.075,45.225 U1.1@27.4,44.9
  Top Layer w0.3: Cboot.1@23.675,40.025 v1(23.675,41.316)
  Bottom Layer w0.2: v1(23.675,41.316) 24.675,41.316 25.537,42.177 v1(25.537,45.227)
NetCboot_2: Cboot.2 L1.1 U1.6 U1.19 U1.20 | length 6.3
  Top Layer w0.127: U1.6 U1.20
  Top Layer w0.2: v1(27.5,41.5) 28.1,42.1 U1.6
  Top Layer w0.3: U1.20 U1.19
  Bottom Layer w0.2: v1(26,41) 26.5,41.5 v1(27.5,41.5)
NetCvcc_1: Cvcc.1 Rmh.1 Rpg.2 U1.17 | length 9
  Top Layer w0.127: Rpg.2 Rpg.2@26.819,49.622 ; Cvcc.1 Cvcc.1@29.45,47.5 ; U1.17 Cvcc.1@29.45,47.5 ; Rmh.1 29.5,47.5 Cvcc.1@29.45,47.5
  Top Layer w0.3: Rpg.2@26.819,49.622 28.196,51 Rmh.1
NetD1_A: D1.A D4.1 | length 3.7
  Top Layer w0.7: D4.1 D1.A
NetD2_A: D2.A R2.1 | length 5.3
  Top Layer w0.7: R2.1 D2.A
NetD3_A: D3.A R3.1 | length 4.3
  Top Layer w0.127: D3.A@13.596,26.486 D3.A
  Top Layer w0.7: R3.1 D3.A@13.596,26.486
NetD4_2: D4.2 R1.1 | length 2.4
  Top Layer w0.7: R1.1 D4.2
NetIC1_16: IC1.16 J11.5 | length 37.8
  Top Layer w0.127: IC1.16 76.316,29.316 83.677,29.316 83.993,29 v1(90,29) ; v1(93,29) 93,31.5 95.25,33.75 J11.5
  Bottom Layer w0.127: v1(90,29) v1(93,29)
NetIC1_17: IC1.17 J11.4 | length 34.2
  Top Layer w0.127: IC1.17 78.754,31.304 80.059,30 v1(90,30) ; v1(94,30) 94,31.115 94.385,31.5 109.839,31.5 109.846,31.494 110.306,31.494 J11.4
  Bottom Layer w0.127: v1(90,30) v1(94,30)
NetIC1_20: IC1.20 J12.4 | length 43.5
  Top Layer w0.127: IC1.20 78.32,32.788 79.275,32.788 80.589,34.102 88.311,34.102 91.5,30.913 91.5,29.5 85.885,23.885 85.885,22.087 86.777,21.195 89.805,21.195 93,18 J12.4
NetIC1_21: IC1.21 J12.3 | length 46.1
  Top Layer w0.127: IC1.21 79.239,33.304 80.397,34.462 88.384,34.462 91.754,31.093 91.754,29.395 86.181,23.822 86.181,22.283 86.936,21.528 91.972,21.528 95.5,18 J12.3
NetIC1_22: IC1.22 J12.2 | length 48.3
  Top Layer w0.127: IC1.22 79.222,33.804 80.215,34.797 88.512,34.797 92.008,31.301 92.008,29.29 86.485,23.767 86.485,22.415 87.068,21.833 93.667,21.833 98,17.5 J12.2
NetIC1_23: IC1.23 J12.1 | length 50.9
  Top Layer w0.127: IC1.23 79.211,34.304 80.08,35.173 88.609,35.173 92.262,31.52 92.262,29.184 86.739,23.662 86.739,22.567 87.189,22.117 95.883,22.117 100.5,17.5 J12.1
NetIC1_44: IC1.44 U3.4 | length 29.7
  Top Layer w0.127: IC1.44@70.802,40.807 70.802,42.708 v1@71.542,43.448
  Top Layer w0.2: v1(85.562,45.894) 85.585,45.916 96.677,45.916 U3.4
  Bottom Layer w0.127: v1(71.542,43.46) 74.582,46.5 84.991,46.5 85.562,45.928 v1(85.562,45.894)
NetIC1_45: IC1.45 U3.1 | length 31.7
  Top Layer w0.127: IC1.45 70.316,40.816 70.316,43.466 v1(70.934,44.084)
  Top Layer w0.2: v1(85.533,46.842) 88.439,49.748 U3.1
  Bottom Layer w0.127: v1(70.934,44.084) 73.72,46.87 85.505,46.87 v1(85.533,46.842)
NetIC1_46: IC1.46 J11.2 | length 92.6
  Top Layer w0.127: v1@62.013,17.283 62.013,38.188 63.325,39.5 69.5,39.5 69.804,39.804 IC1.46 ; J11.2 110.565,26.265 112.51,26.265 v1(112.524,26.279)
  Bottom Layer w0.127: v1(62.019,17.278) 62.038,17.258 62.038,16.89 62.248,16.681 111.914,16.681 112.524,17.291 v1(112.524,26.279)
NetIC1_49: IC1.49 J11.3 | length 87.1
  Top Layer w0.127: v1@62.854,17.297 62.854,38.084 63.574,38.804 IC1.49 ; J11.3 110.57,28.77 111.846,28.77 v1(111.865,28.789)
  Bottom Layer w0.127: v1(62.859,17.292) 62.904,17.292 63.196,17 111.5,17 111.865,17.365 v1(111.865,28.789)
NetIC1_60: IC1.60 R8.2 | length 2.1
  Top Layer w0.3: R8.2@64.82,33.646 65.162,33.304 66.354,33.304 IC1.60
NetR9_2: R9.2 U3.8 | length 1.9
  Top Layer w0.127: R9.2@101.592,51.519 R9.2
  Top Layer w0.6: U3.8 R9.2@101.639,51.542
NetRenb_2: Renb.2 Rent.1 U1.12 | length 5.9
  Top Layer w0.2: U1.12 30.927,43.55 31.975,42.502 31.975,42.175
  Top Layer w0.3: Rent.1 30.097,39.826 30.801,39.826 Renb.2 31.975,42.175
NetRfbb_2: Rfbb.2 Rfbt.1 U1.14 | length 10.2
  Top Layer w0.2: U1.14 30.959,44.45 31.461,44.952 Rfbb.2 34.048,44.952 34.95,44.05 Rfbt.1@34.95,39
NetRmh_2: Rmh.2 Rml.2 U1.15 | length 11.1
  Top Layer w0.127: U1.15@30.5,44.9 30.6,44.9 32.25,46.55 Rml.2 ; U1.15@30.586,44.937 30.586,45.487 31.5,46.4 31.5,47 32.5,48 32.5,49.8 Rmh.2
NetRpg_1: Rpg.1 U1.9 | length 10.3
  Top Layer w0.127: Rpg.1@26.721,48.72 Rpg.1@26.755,48.686 ; U1.9 U1.9@29.456,42.594 ; v1@29.456,41.636 v1(29.462,41.63)
  Top Layer w0.2: Rpg.1@26.755,48.686 v1(28.026,48.686) ; v1@29.456,41.636 U1.9@29.456,42.594
  Bottom Layer w0.127: v1(28.026,48.686) 28.026,46.974 28.5,46.5 28.5,41.926 28.81,41.615 29.447,41.615 v1(29.462,41.63)
OSC_IN: C8.1 IC1.5 Y1.1 | length 5.8
  Top Layer w0.127: 69.12,24.278 69.194,24.353
  Top Layer w0.3: Y1.1@69.95,26.239 70.803,27.092 70.803,28.853 70.804,28.854 IC1.5
  Top Layer w0.6: C8.1 69.12,24.278 ; Y1.1@69.263,24.353 Y1.1@69.95,25.039
OSC_OUT: C7.1 IC1.6 Y1.2 | length 6.8
  Top Layer w0.3: IC1.6@71.304,29.302 71.304,28.854 71.302,28.852 71.302,26.187 Y1.2
  Top Layer w0.6: Y1.2 72.404,25.085 C7.1
RPOT1: IC1.26 J9.2 | length 31.7
  Top Layer w0.127: IC1.26@78.306,35.803 81.943,35.803 84.981,38.841 84.981,42.858 81.57,46.269 81.57,58.681 80,60.251 J9.2
RPOT2: IC1.27 J10.2 | length 36.9
  Top Layer w0.127: IC1.27@78.311,36.298 82.079,36.298 84.533,38.751 84.533,42.589 80.578,46.543 v1(80.578,48.044) ; v1(83,48) 92,57 J10.2
  Bottom Layer w0.127: v1(80.578,48.044) 80.6,48.022 82.978,48.022 v1(83,48)
VCC3V3: C4.2 C9.2 C10.2 C11.2 C12.2 C13.2 C14.2 C15.2 C16.1 C17.1 C18.1 IC1.1 IC1.13 IC1.19 IC1.32 IC1.48 IC1.64 J3.1 J9.1 J10.1 J11.1 J12.5 R3.2 R4.2 R5.2 R6.2 R7.2 U2.5 U3.3 | length 104.1
  Top Layer w0.127: J3.1 J3.1@9.703,19.61 ; U2.5@27.45,21.754 U2.5 ; C10.2 C10.2@67.94,27.52 ; IC1.48@68.793,40.815 IC1.48 ; 78.271,41.097 78.307,41.06 ; C13.2@80.98,32 C13.2 ; J11.1@110.3,23.5 J11.1
  Top Layer w0.2: IC1.13 74.804,31.291 75.818,32.304 IC1.19
  Top Layer w0.3: IC1.48@68.802,40.352 68.804,40.354 IC1.48@68.804,40.802 ; IC1.48 IC1.48@68.804,41.254 ; IC1.13@74.804,29.302 74.804,28.854 74.807,28.852 74.807,28.413 75,28.22 C9.2 ; IC1.32@77.853,38.806 77.854,38.804 IC1.32 ; v1(88.059,47.663) 88.071,47.652 C18.1@93.998,47.652 ; C18.1 94.832,47.65 95.117,47.365 U3.3@96.699,47.365
  Top Layer w0.4: v1(63.5,50) R4.2 ; v1(66,50) R5.2 ; v1(68.5,50) R6.2 ; v1(71,50) R7.2 ; IC1.32@78.253,38.854 v1@78.253,49.247 ; 78.307,41.06 C12.2
  Top Layer w0.5: v1(82.5,49.5) v1(82.5,60.55) ; v1(86.5,49.5) 94.5,57.5 J10.1 ; v1(88,19) 90.5,16.5 J12.5
  Top Layer w0.7: R3.2 7.73,21.584 J3.1 ; v2(88,23.5) J11.1@110.3,23.5
  other v1: 28,18.5 28,19.5 63.5,49 78.25,49.25
  other v2: 66.5,19 88.039,32.237
VCC5V: "Cout x4.2" C3.2 Cout2.2 Cout3.2 Cout4.2 J2.1 J12.6 L1.2 R2.2 Rfbt.2 U2.1 U2.3 | length 91.8
  Top Layer w0.127: R2.2@7.722,38.492 R2.2 ; C3.2 C3.2@20.655,27.39 ; 87.926,6.5 88,6.574
  Top Layer w0.6: L1.2 31.91,10.59 36,6.5 87.926,6.5 ; 88,6.574 J12.6
  Top Layer w0.7: R2.2@7.722,38.492 7.722,33.592 J2.1
VCC12V: Cin.1 Cinx.1 J1.1 R1.2 Rent.2 U1.2 U1.3 U1.4 U1.5 | length 18.2
  Top Layer w0.127: 26.953,43.1 26.953,43.55 26.953,44 26.953,44.45
  Top Layer w0.3: 26.378,42.773 26.378,41.622 28.158,39.842 Rent.2@29.065,39.842 ; 26.953,44.45 U1.2
  Top Layer w0.5: 26.953,43.1 U1.5 ; 26.953,43.55 U1.4 ; 26.953,44 U1.3
  Top Layer w0.7: R1.2 3.717,49.597 J1.1
pads on no net: IC1.2 IC1.3 IC1.4 IC1.8 IC1.9 IC1.10 IC1.11 IC1.14 IC1.15 IC1.28 IC1.29 IC1.33 IC1.34 IC1.35 IC1.38 IC1.39 IC1.40 IC1.41 IC1.42 IC1.43 IC1.50 IC1.51 IC1.52 IC1.53 IC1.54 IC1.55 IC1.56 IC1.57 IC1.58 IC1.59 IC1.61 IC1.62 U1.11 U2.4 U3.5

## Polygon pours and split planes (outlines as drawn)
VCC3V3 on Top Layer "VCC3V3_L01_P021" (solid, pour order 21): 64,49.5 63,49.5 63,42 68.5,42 68.5,40.802 69.067,40.802 69.067,43.433 69,43.5 64,43.5
VCC3V3 on Top Layer "VCC3V3_L01_P020" (solid, pour order 20): 65.5,28.5 65.5,29.994 65.383,30.111 64.426,30.111 64.426,31.5 67,31.5 67,31 67,29.105 69.058,29.094 69.057,29.092 69.057,27.557 68.716,27.216 68.714,27.216 68.714,25.214 67.5,24 67.5,18 65.5,18 65.5,24 67.5,25.5 67.513,25.513 67.513,28.487 67.5,28.5
VCC3V3 on Top Layer "VCC3V3_L01_P019" (solid, pour order 19): 80.5,32.551 78.5,32.551 78.5,32.056 80.5,32.056 80.5,31.5 89,31.5 89,33 80.5,33
VCC5V on Top Layer "VCC5V_L01_P008" (solid, pour order 8): 23.5,27.5 23,27 19,27 19,28.5 21.5,28.5 22,29 20.5,30.5 8,30.5 8,33 21,33 24.5,29.5 30,29.5 30,37.5 32,39.5 33,39.5 33.006,39.494 34.426,39.494 34.433,38.5 49,38.5 49,35.5 34.452,35.5 34.503,27.5 27.885,27.5 27.885,25 27,25 27.015,25.015 27.015,27.5 26,27.5 25.985,25 25.106,25 25.106,27.5
GND on Top Layer "GND_L01_P010" (solid, pour order 10): 35.5,39 49,39 49,42.5 35.5,42.5
VCC3V3 on Top Layer "VCC3V3_L01_P009" (solid, pour order 9): 28.5,18 7.5,18 7.5,21 11.5,21 12,20.5 27,20.5 26.999,23.503 27.002,23.5 28.5,23.5
NetCboot_2 on Top Layer "NETCBOOT_2_L01_P004" (solid, pour order 4): 28.5,37.5 28.5,30 25,30 25,38.573 24.153,39.42 24.153,40.681 24.898,40.681 24.902,40.677 25.838,41.613 25.89,41.613 28.504,38.999 28.504,38.619
VCC12V on Top Layer "VCC12V_L01_P000" (solid, pour order 0): 8,45 8,42.5 26,42.5 26,42.585 27,42.585 27,44.697 12,44.697 12,45
GND on Bottom Layer "GND_L02_P017" (solid, pour order 17): 0,70 0,0 120,0 120,70
VCC3V3 on Bottom Layer "VCC3V3_L02_P013" (solid, pour order 13): 62.5,50.5 62.5,48.5 87,48.5 87,20 27.5,20 27.5,18 89,18 89,50.5

## Silkscreen, mask and mechanical layers (free items; w line width, h text height)
Top Overlay:
  text "Designed By:" at 36.754,29.762 h1.52
  text "Allan Li Yang" at 38.254,27.262 h1.52
  text "For Queen's FSAE" at 39.754,24.754 h1.52